# Altium PCB TAUV-Powerboard.PcbDoc (part 2 of 2)
Units mil, origin at the board's own origin, x right, y up, seen from the top; angles counter-clockwise.
Board outline 4762.5 x 3417.5 mil, 4 copper layers (Component Side, Ground Plane, Power Plane, Solder Side), stack 33.234 mil thick; 159 components, 82 nets, 454 pads, 262 vias.
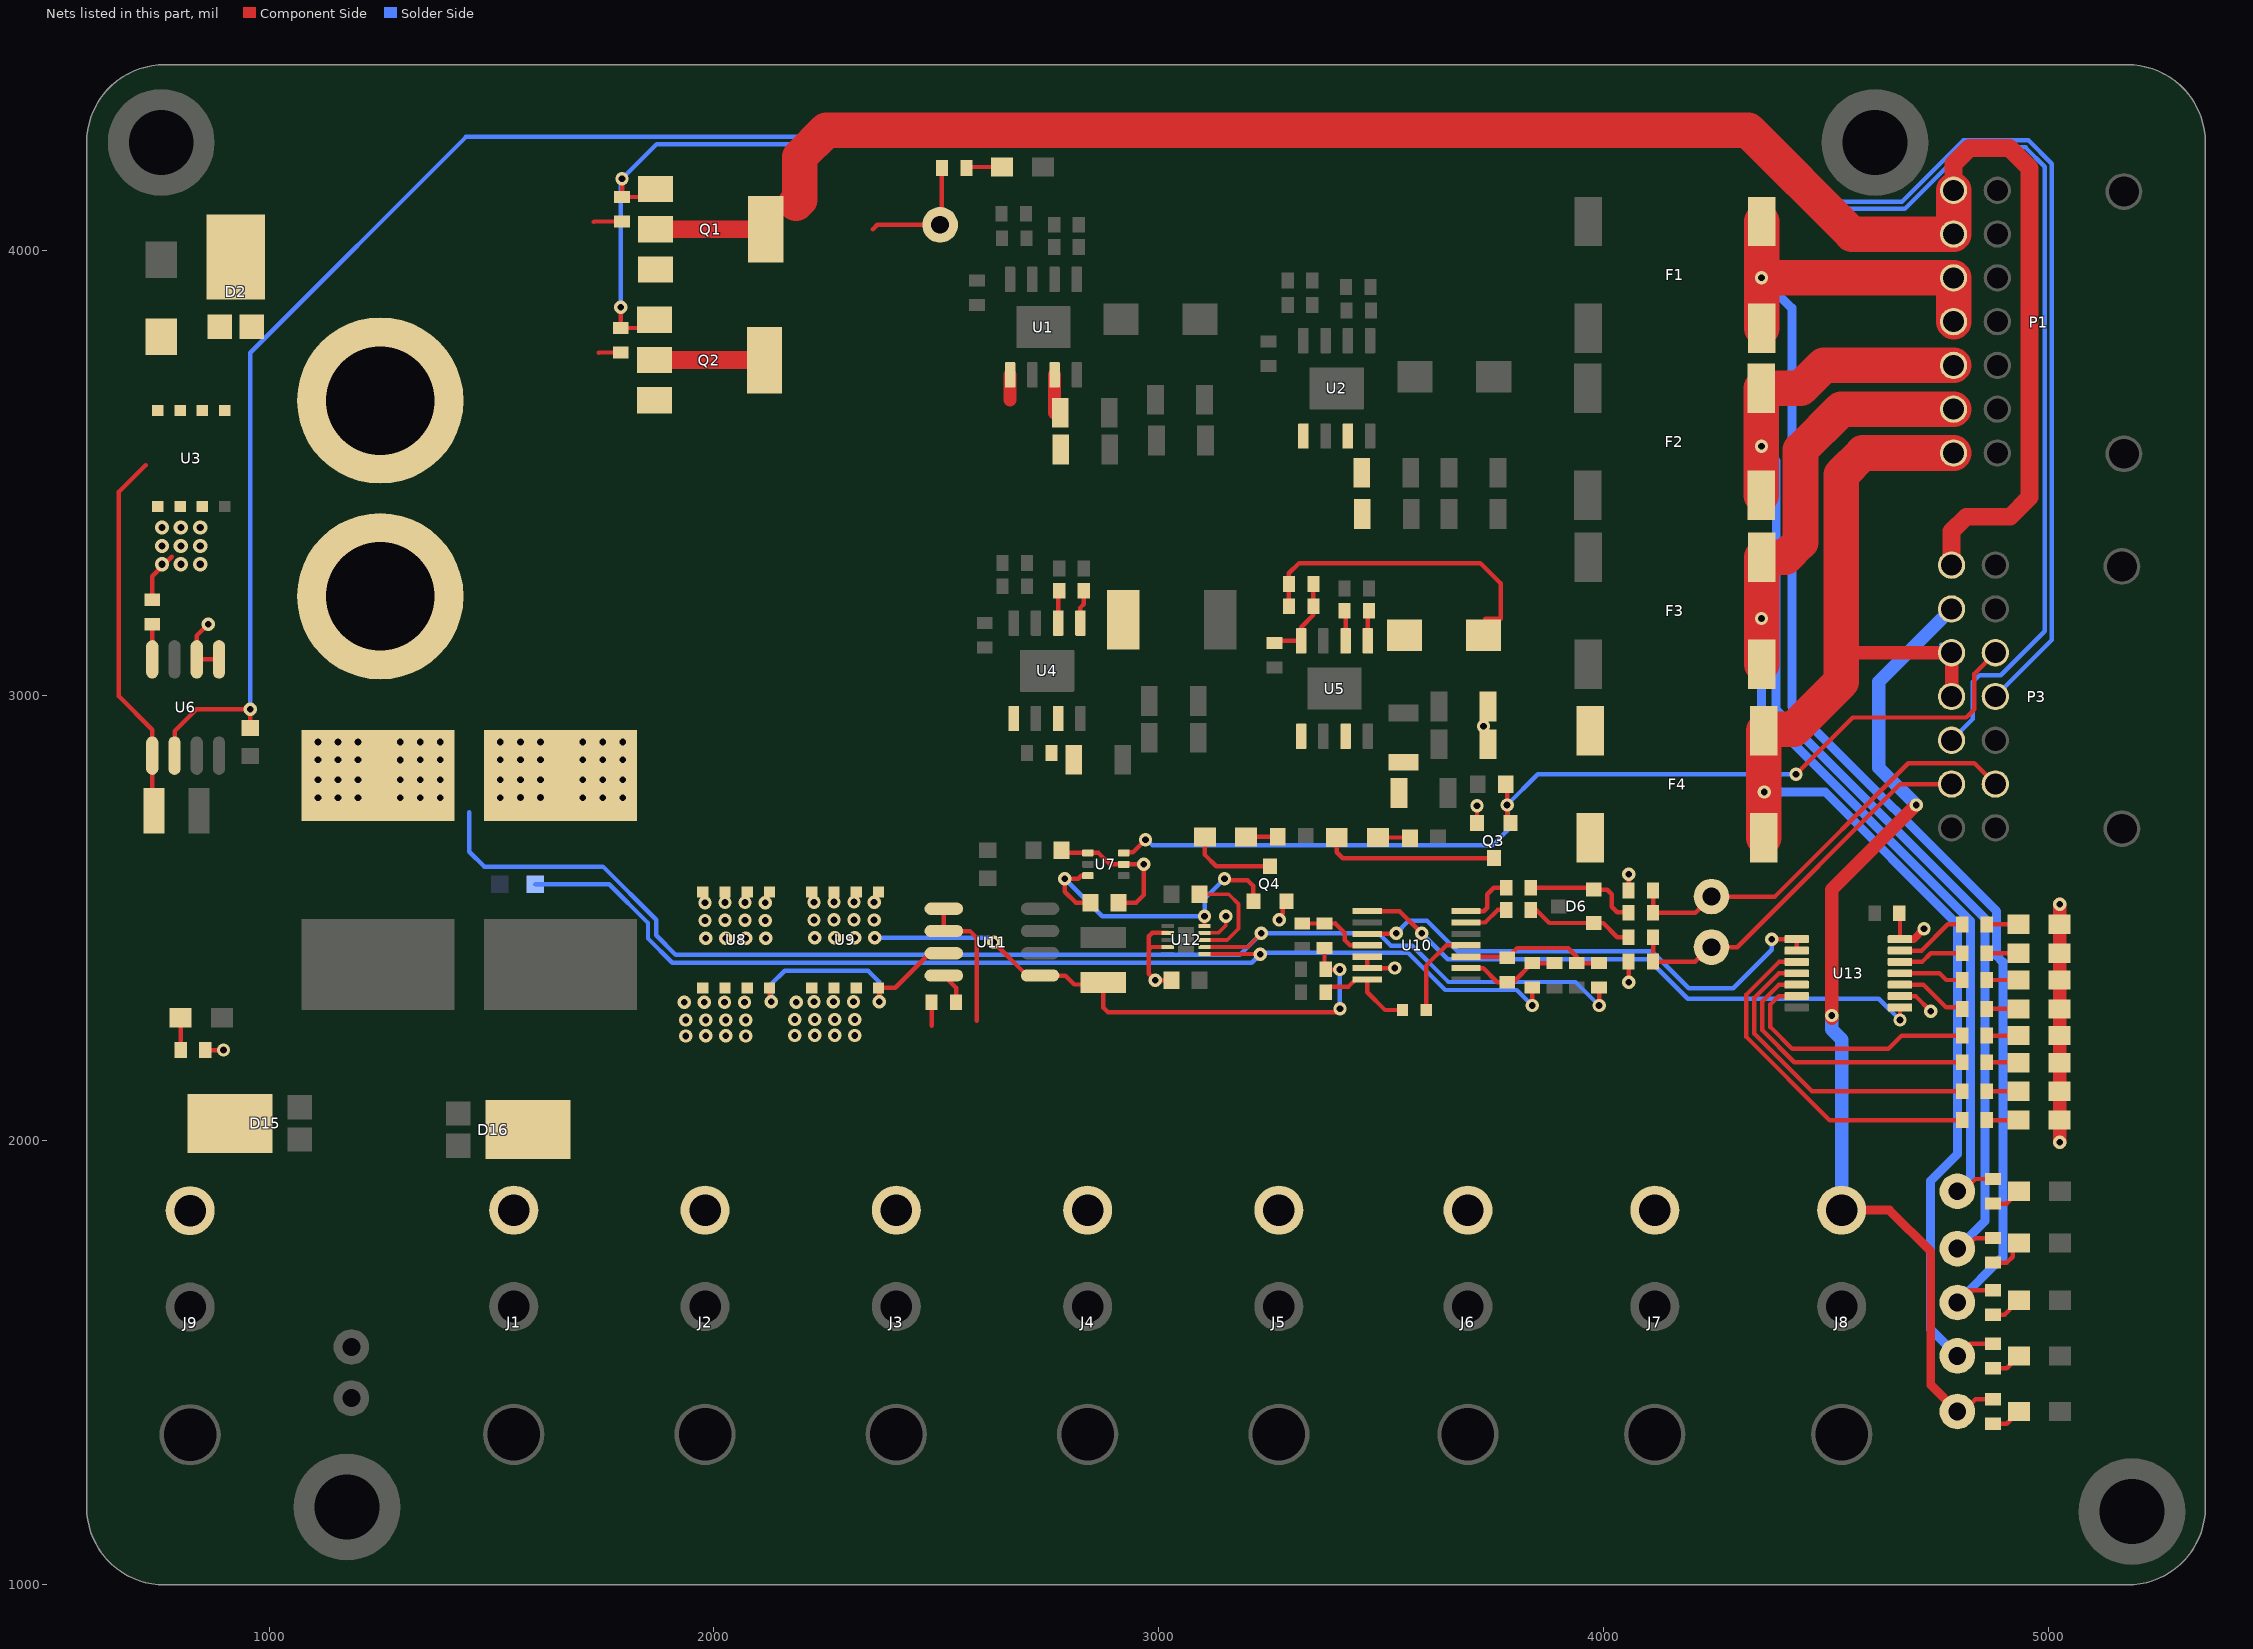
[diagram p4: the nets of this part, all layers, seen from the top]

## Via types
v1: diameter 30, hole 15, Component Side to Solder Side, tented both sides, 223 vias
v2: diameter 20, hole 10, Component Side to Solder Side, tented top, 18 vias
v3: diameter 32, hole 16, Component Side to Solder Side, tented both sides, 15 vias
v4: diameter 20, hole 10, Component Side to Solder Side, tented both sides, 6 vias

## Nets (pads, with @x,y where several pads share a name; then routed paths per layer and width w, separated by ;. In a path a pad name is that pad's centre, name@x,y a point inside that pad or via, vN(x,y) a via of type N, cw(c..) or ccw(c..) an arc to the next point about the centre after c; other vN are vias at no path point) (continued)
NetC18_1: C18.1 L3.1 U4.1 | length 75.8
  Component Side w10: U4.1@2823.94,3162.28 2823.94,3197.2 2831.5,3204.75 C18.1@2831.5,3235
NetC18_2: C18.2 U4.2 | length 73.7
  Component Side w10: U4.2@2773.94,3162.28 2773.94,3232.56 C18.2@2776.38,3235
NetC19_1: C19.1 U6.8 | length 79.1
  Component Side w10: U6.8@737.5,3080.77 C19.1@737.5,3159.88
NetC20_1: C20.1 R9.1 R11.2 U5.4 | length 202.7
  Component Side w10: R11.2@3260,3119.53 3260,3122.28 U5.4@3320,3122.28 3320,3153.2 3347.56,3180.76 C20.1@3347.56,3200 3347.56,3248.03 R9.1@3349.53,3250
NetC20_2: C20.2 C23.2 C26.2 F4.1 L4.2 R9.2 | length 693
  Component Side w10: C20.2@3292.44,3200 R9.2@3292.44,3250 3292.44,3273.98 3315.34,3296.88 3723.08,3296.88 3768.66,3251.31 3768.66,3172.03 3733.48,3172.03
  other v1: 3730,2930
NetC21_1: C21.1 L4.1 U5.1 | length 68.8
  Component Side w10: U5.1@3470,3122.28 3470,3187.44 C21.1@3472.56,3190
NetC21_2: C21.2 U5.2 | length 68.8
  Component Side w10: C21.2@3417.44,3190 3420,3187.44 U5.2@3420,3122.28
NetC40_1: C40.1 U11.8 | length 71.4
  Component Side w10: U11.8@2516.73,2370 2544.29,2342.44 C40.1@2544.29,2310
NetD1_2: D1.2 R1.1 | length 80.6
  Component Side w10: R1.1@2567.56,4185 2570.06,4187.5 D1.2@2647.12,4187.5
NetD2_2: D2.2 Q1.3 Q2.3 R3.2 R7.2 | length 113.5
  Component Side w10: 1730.04,4063.85 1731.13,4064.94 R3.2@1793.42,4064.94 ; 1741.04,3770.16 1741.36,3770.48 R7.2@1790.57,3770.48
NetD4_1: D4.1 R16.1 | length 67.8
  Component Side w10: D4.1@3196.28,2681.58 3255.84,2681.58 R16.1@3261.63,2687.38
NetD4_2: D4.2 Q4.3 | length 197.1
  Component Side w10: D4.2@3103.76,2681.58 3103.76,2641.02 3128.91,2615.87 Q4.3@3249.87,2615.87
NetD5_1: D5.1 R17.1 | length 73
  Component Side w10: D5.1@3492.63,2680.23 3563.33,2680.23 R17.1@3564.93,2678.63
NetD5_2: D5.2 Q3.3 | length 391.6
  Component Side w10: D5.2@3400.11,2680.23 3400.11,2647.16 3413.35,2633.92 Q3.3@3753.11,2633.92
NetD6_1: D6.1 R23.2 R28.1 | length 245.2
  Component Side w10: R23.2@3836.07,2517.5 3848.51,2517.5 3877.91,2488.1 D6.1@3977.88,2488.1 3999,2488.1 4030.82,2456.28 R28.1@4055.95,2456.28
NetD6_2: D6.2 R19.2 R24.1 | length 259.4
  Component Side w10: R19.2@3836.07,2567.5 3973.28,2567.5 D6.2@3977.88,2562.9 4008.11,2562.9 4018.51,2552.5 4018.51,2524.81 4030.82,2512.5 4054.73,2512.5 R24.1@4055.95,2511.28
NetD7_1: D7.1 R25.2 | length 71.2
  Component Side w10: R25.2@4861.3,2485 D7.1@4932.48,2485
NetD8_1: D8.1 R29.2 | length 71.2
  Component Side w10: R29.2@4861.3,2420 D8.1@4932.48,2420
NetD9_1: D9.1 R33.2 | length 71.2
  Component Side w10: R33.2@4861.3,2360 D9.1@4932.48,2360
NetD10_1: D10.1 R34.2 | length 71.2
  Component Side w10: R34.2@4861.3,2295 D10.1@4932.48,2295
NetD11_2: D11.2 R36.1 | length 72.5
  Component Side w10: R36.1@801.19,2202.5 801.24,2202.55 D11.2@801.24,2275
NetD12_1: D12.1 R35.2 | length 71.2
  Component Side w10: R35.2@4861.3,2235 D12.1@4932.48,2235
NetD13_1: D13.1 R37.2 | length 71.6
  Component Side w10: R37.2@4861.3,2175 4931.5,2175 D13.1@4932.48,2174.02
NetD14_1: D14.1 R38.2 | length 71.2
  Component Side w10: R38.2@4861.3,2110 D14.1@4932.48,2110
NetD17_1: D17.1 R39.2 | length 71.2
  Component Side w10: R39.2@4861.3,2045 D17.1@4932.48,2045
NetD18_2: D18.2 R40.1 | length 71.9
  Component Side w10: R40.1@4875,1857.44 4906.18,1857.44 4914.13,1865.39 4914.13,1868.35 4930.79,1885 D18.2@4933.74,1885
NetD19_2: D19.2 R41.1 | length 86.8
  Component Side w10: R41.1@4875,1724.72 4906.18,1724.72 4919.61,1738.15 4919.61,1754.82 D19.2@4933.74,1768.95
NetD20_2: D20.2 R42.1 | length 72.2
  Component Side w10: R42.1@4875,1607.44 4901.18,1607.44 D20.2@4933.74,1640
NetD21_2: D21.2 R43.1 | length 70.2
  Component Side w10: R43.1@4875,1487.44 4906.18,1487.44 D21.2@4933.74,1515
NetD22_2: D22.2 R44.1 | length 70.2
  Component Side w10: R44.1@4875,1362.44 4906.18,1362.44 D22.2@4933.74,1390
NetP3_5: P3.5 Q1.1 Q2.1 R3.1 R7.1 | length 5312.9
  Component Side w10: v1(1790.57,3872.47) R7.1@1790.57,3825.6 1847.54,3825.6 Q2.1@1865.98,3844.05 ; v1(1793.42,4160.9) R3.1@1793.42,4120.06 1850.33,4120.06 Q1.1@1868.48,4138.21
  Solder Side w10: v1(1790.57,3872.47) 1790.57,4158.05 v1(1793.42,4160.9) 1871.52,4239 4341,4239 4486.58,4093.42 4677.27,4093.42 4815.35,4231.5 4948.37,4231.5 4991.5,4188.37 4991.5,3144 4892.5,3045 4845,3045 4830,3030 4830,2946.69 P3.5@4782.13,2898.82
NetP3_6: P3.6 R28.2 R30.1 TP3.1 | length 891.4
  Component Side w10: R28.2@4111.07,2456.28 R30.1@4111.07,2401.28 4205.5,2401.28 4238,2433.78 TP3.1@4242.5,2433.78 4300.19,2433.78 4666.8,2800.39 P3.6@4782.13,2800.39
NetP3_11: P3.11 R12.1 U6.2 | length 6721.6
  Component Side w10: U6.2@787.5,2864.23 787.5,2918.89 836.91,2968.31 v1(957.5,2968.31) R12.1@957.5,2934
  Solder Side w10: v1(957.5,2968.31) 957.5,3770 1442.5,4255 4347.63,4255 4493.21,4109.42 4670.65,4109.42 4808.72,4247.5 4955,4247.5 5007.5,4195 5007.5,3124.19 P3.11@4880.55,2997.24
NetP3_13: P3.13 R20.1 R24.2 TP2.1 | length 978.3
  Component Side w10: R20.1@4111.07,2561.28 R24.2@4111.07,2511.28 4206.28,2511.28 TP2.1@4242.5,2547.5 4385,2547.5 4685,2847.5 4833.44,2847.5 P3.13@4880.55,2800.39
NetR19_1: R19.1 U10.14 | length 130.1
  Component Side w10: U10.14@3690.51,2514.77 3730.78,2514.77 3738.51,2522.5 3738.51,2552.9 3753.11,2567.5 R19.1@3780.95,2567.5
NetR21_1: R21.1 U12.3 | length 238.9
  Component Side w8: R21.1@3091.5,2552.5 3157.28,2552.5 3179.17,2530.61 3179.17,2475.4 3153.67,2449.91 U12.3@3102.81,2449.91
NetR23_1: R23.1 U10.13 | length 102.2
  Component Side w10: U10.13@3690.51,2489.18 3733.5,2489.18 3761.82,2517.5 R23.1@3780.95,2517.5
NetR25_1: R25.1 U13.13 | length 164.4
  Component Side w10: U13.13@4666.14,2426.18 4715,2426.18 4773.82,2485 R25.1@4806.18,2485
NetR26_2: R26.2 R27.1 U10.4 | length 175.6
  Component Side w10: R26.2@3322.5,2486.94 3396.45,2486.94 3396.54,2487.03 3418.51,2465.06 3418.51,2449.27 3429.78,2438 U10.4@3468.51,2438
NetR29_1: R29.1 U13.12 | length 148.1
  Component Side w10: U13.12@4666.14,2400.59 4715.83,2400.59 4735.24,2420 R29.1@4806.18,2420
NetR33_1: R33.1 U13.11 | length 146.3
  Component Side w10: U13.11@4666.14,2375 4755,2375 4770,2360 R33.1@4806.18,2360
NetR34_1: R34.1 U13.10 | length 162.6
  Component Side w10: U13.10@4666.14,2349.41 4718.82,2349.41 4770,2298.23 4802.95,2298.23 R34.1@4806.18,2295
NetR35_1: R35.1 U13.6 | length 581.4
  Component Side w10: U13.6@4433.86,2323.82 4393.82,2323.82 4375,2305 4375,2254.23 4424.23,2205 4640,2205 4670,2235 R35.1@4806.18,2235
NetR37_1: R37.1 U13.5 | length 636.8
  Component Side w10: U13.5@4433.86,2349.41 4393.95,2349.41 4357,2312.46 4357,2246.78 4428.78,2175 R37.1@4806.18,2175
NetR38_1: R38.1 U13.4 | length 719
  Component Side w10: U13.4@4433.86,2375 4394.09,2375 4339,2319.91 4339,2239.32 4468.32,2110 R38.1@4806.18,2110
NetR39_1: R39.1 U13.3 | length 801.3
  Component Side w10: U13.3@4433.86,2400.59 4394.22,2400.59 4321,2327.37 4321,2231.87 4507.87,2045 R39.1@4806.18,2045
NetRT1_2: RT1.2 U10.11 | length 208.4
  Component Side w10: RT1.2@3600.88,2292.5 3600.88,2392.31 3646.57,2438 U10.11@3690.51,2438
OCP_N: Q4.1 R22.1 U7.3 U12.5 | length 730.9
  Component Side w8: U12.5@3102.81,2481.41 v1(3102.81,2503.28)
  Component Side w10: U7.3@2840.66,2594.48 2825.67,2594.48 2818.69,2587.5 v1(2788.83,2587.5) 2788.83,2558.24 2813.12,2533.95 R22.1@2846.44,2533.95 ; v1(3147.75,2587.5) 3151.57,2583.67 3200.17,2583.67 3212.47,2571.38 Q4.1@3212.47,2537.13
  Solder Side w10: v1(2788.83,2587.5) 2873.05,2503.28 v1(3102.81,2503.28) 3102.81,2542.57 v1(3147.75,2587.5)
P1: U10.3 U13.1 U13.2 | length 1125.8
  Component Side w10: U10.3@3468.51,2463.59 3532.04,2463.59 v1(3533.51,2465.06) ; v1(4378.02,2451.77) U13.1@4433.86,2451.77 U13.2@4433.86,2426.18
  Solder Side w10: v1(3533.51,2465.06) 3561.51,2493.06 3602.95,2493.06 3671.68,2424.33 4107.81,2424.33 4191.01,2341.13 4291.13,2341.13 4378.02,2428.02 v1(4378.02,2451.77)
P2: U10.1 U13.8 | length 1327.5
  Component Side w10: U10.1@3468.51,2514.77 3541.24,2514.77 v1(3590.95,2465.06) ; v1(4666.14,2270.12) U13.8@4666.14,2298.23
  Solder Side w10: v1(3590.95,2465.06) 3649.68,2406.33 4100.31,2406.33 4189.14,2317.5 4500.4,2317.5 4500.9,2318 4618.26,2318 v1(4666.14,2270.12)
REG25: C39.2 RT1.1 U10.7 | length 231.1
  Component Side w10: C39.2@3375.06,2332.41 3375.06,2336.35 3383.84,2345.13 3425.49,2345.13 ; 3426.5,2345.22 3442.51,2361.23 U10.7@3468.51,2361.23 3468.51,2332.62 3508.63,2292.5 RT1.1@3547.74,2292.5
RSENSE+: NT1.2 R31.1 U12.1 | length 2558.9
  Component Side w8: U12.1@3102.81,2418.41 3227.26,2418.41 v1(3227.91,2417.76)
  Component Side w10: v1(3839.73,2302.5) R31.1@3839.73,2342.97
  Solder Side w10: NT1.2@1598.56,2575 1765,2575 1851.82,2488.18 1851.82,2453.18 1906.23,2398.77 3208.92,2398.77 v1(3227.91,2417.76) 3231.21,2421.06 3560.09,2421.06 3643.65,2337.5 3804.73,2337.5 v1(3839.73,2302.5)
RSENSE-: P2.1 R13.1 R14.1 R32.1 U12.2 | length 3012.9
  Component Side w8: U12.2@3102.81,2434.16 3199.84,2434.16 v1(3230.68,2465)
  Component Side w10: v1(3989.73,2302.5) R32.1@3989.73,2342.97
  Solder Side w10: 1450,2736.77 1450,2648.56 1483.56,2615 1750.46,2615 1870.16,2495.3 1870.16,2460.3 1913.69,2416.77 3182.44,2416.77 v1(3230.68,2465) 3493.97,2465 3521.91,2437.06 3569.54,2437.06 3651.1,2355.5 3936.73,2355.5 v1(3989.73,2302.5)
  other v1: 1110,2769.76 1155,2769.88 1200,2769.88 1295,2769.65 1340,2769.76 1385,2769.76 1520,2769.88 1565,2770 1610,2770 1705,2769.76 1750,2769.88 1795,2769.88 1110,2809.76 1155,2809.88 1200,2809.88 1295,2809.76 1340,2809.88 1385,2809.88 1520,2809.88 1565,2810 1610,2810 1705,2809.88 1750,2810 1795,2810 1110,2854.76 1155,2854.88 1200,2854.88 1295,2854.65 1340,2854.76 1385,2854.76 1520,2854.88 1565,2855 1610,2855 1705,2854.76 1750,2854.88 1795,2854.88 1110,2894.88 1155,2895 1200,2895 1295,2894.76 1340,2894.88 1385,2894.88 1520,2895 1565,2895.12 1610,2895.12 1705,2894.88 1750,2895 1795,2895
SRN: C34.1 C36.2 R32.2 U10.10 | length 331.6
  Component Side w10: U10.10@3690.51,2412.41 3781.16,2412.41 C34.1@3783.51,2410.06 3805.36,2431.91 3920.23,2431.91 3939.73,2412.41 C36.2@3939.73,2398.09 R32.2@3989.73,2398.09
SRP: C34.2 C35.2 R31.2 U10.9 | length 230.3
  Component Side w10: U10.9@3690.51,2386.82 3729.19,2386.82 3761.07,2354.94 C34.2@3783.51,2354.94 3796.58,2354.94 R31.2@3839.73,2398.09 C35.2@3889.73,2398.09
THRST_EN: P3.10 Q3.1 R15.1 U7.6 | length 2328.6
  Component Side w10: U7.6@2921.37,2645.66 2922.66,2646.96 2941.96,2646.96 v1(2970,2675) ; R15.1@3779.83,2800 3782.92,2796.91 v1(3782.92,2753.43) 3782.92,2720.25 Q3.1@3790.51,2712.66 ; v1(4432.5,2822.5) 4560,2950 4815,2950 4833.44,2968.44 4833.44,3048.56 P3.10@4880.55,3095.67
  Solder Side w10: v1(2970,2675) 2973.36,2675 2985.86,2662.5 3750,2662.5 3782.92,2695.42 v1(3782.92,2753.43) 3852,2822.5 v1(4432.5,2822.5)
THRUSTERS_GATE: U8.4 U9.4 U11.7 | length 595.4
  Component Side w10: U8.4@2125,2342.32 2125,2311.37 v1(2129.1,2311.37) ; v1(2371.27,2310.7) 2371.27,2341.05 U9.4@2370,2342.32 2407.32,2342.32 2485,2420 U11.7@2516.73,2420
  Solder Side w10: v1(2129.1,2311.37) 2129.1,2350.82 2158.87,2380.59 2346.48,2380.59 2371.27,2355.79 v1(2371.27,2310.7)
VBAT: C30.2 C33.2 C37.2 D2.1 D3.1 P2.2 R27.2 U3.5 U3.6 U3.7 U3.8 U6.1 U8.5 U8.6 U8.7 U8.8 U9.5 U9.6 U9.7 U9.8 U11.1 | length 2166.1
  Component Side w10: 722.5,3517.5 662.5,3457.5 662.5,2997.5 737.5,2922.5 U6.1@737.5,2864.23 737.5,2744.14 C30.2@741.64,2740 ; v1(2629.14,2444.77) 2703.9,2370 U11.1@2733.27,2370 2789.71,2370 2809.83,2349.88 2870.08,2349.88 C33.2@2875,2354.8 2875,2298 2885.86,2287.14 3399.64,2287.14 v1(3407.5,2295) ; R27.2@3376.91,2427.41 R27.2@3372.5,2431.82 3372.5,2386.94 C37.2@3375.06,2384.38 3375.96,2383.48 v1@3405.92,2383.48
  Solder Side w10: v1(2361.43,2455) 2618.9,2455 v1(2629.14,2444.77) ; v1(3406.93,2383.57) 3406.93,2295.57 v1(3407.5,2295)
  other v1: 1981.43,2453.95 2026.43,2454.06 2071.43,2454.06 2116.43,2453.95 2226.43,2455 2271.43,2455.12 2316.43,2455.12 1980,2493.83 2025,2493.95 2070,2493.95 2115,2493.83 2225,2494.88 2270,2495 2315,2495 2360,2494.88 1980,2533.95 2025,2534.06 2070,2534.06 2115,2533.95 2225,2535 2270,2535.12 2315,2535.12 2360,2535
VBAT_EXT: C19.2 D15.2 J9.2 R36.2 U3.1 U3.2 U3.3 U6.5 U6.6 | length 295.6
  Component Side w10: C19.2@737.5,3215 737.5,3267.83 781.1,3311.43 ; R36.2@856.31,2202.5 v1(897.67,2202.5) ; v1(863.18,3159.88) 837.5,3134.2 U6.6@837.5,3080.77 U6.5@887.5,3080.77
  other v3: 759.33,3294.58 801.72,3294.58 845.31,3294.58 759.33,3335.53 801.72,3335.53 845.31,3335.53 759.33,3376.9 801.72,3376.9 845.31,3376.9
VBAT_THRUSTERS: C40.2 D16.2 J1.2 J2.2 J3.2 J4.2 J5.2 J6.2 J7.2 J8.2 P3.2 R44.2 TP10.1 U8.1 U8.2 U8.3 U9.1 U9.2 U9.3 U11.5 U11.6 | length 2639.1
  Component Side w10: C40.2@2489.17,2310 2489.17,2257.82 2490,2256.99 ; U11.5@2516.73,2520 U11.6@2516.73,2470 2575.44,2470 2590.44,2455 2590.44,2268.47 ; TP10.1@4795,1390 4808.3,1390 4835.86,1417.56 R44.2@4875,1417.56
  Component Side w20: J8.2@4535,1842.52 4642.48,1842.52 4735.24,1749.76 4735.24,1449.76 TP10.1@4795,1390
  Component Side w30: v1(4512.5,2280) 4512.5,2273.64 4512.5,2563.43 v1(4702.5,2753.43)
  Solder Side w30: v1(4512.5,2280) 4512.5,2248.64 4535,2226.14 J8.2@4535,1842.52 ; v1(4702.5,2753.43) 4618.76,2837.17 4618.76,3030.73 P3.2@4782.13,3194.09
  other v1: 1936.43,2234.21 1981.43,2234.33 2026.43,2234.33 2071.43,2234.21 2181.43,2235.26 2226.43,2235.38 2271.43,2235.38 2316.43,2235.26 1936.43,2270 1981.43,2270.12 2026.43,2270.12 2071.43,2270 2181.43,2271.05 2226.43,2271.17 2271.43,2271.17 2316.43,2271.05 1933.6,2310 1978.6,2310.12 2023.6,2310.12 2068.6,2310 2185,2310 2225,2310.7 2268.6,2311.17 2313.6,2311.05
VCC_3V3: C31.2 C32.2 C38.2 D7.2 D8.2 D9.2 D10.2 D12.2 D13.2 D14.2 D17.2 F4.2 P1.7 P3.3 P3.4 Q3.2 Q4.2 R20.2 R22.2 R30.2 R43.2 TP8.1 U7.1 U7.5 U10.5 U10.6 U12.4 U12.7 U12.9 U13.9 U13.14 | length 4864.6
  Component Side w8: U12.4@3102.81,2465.66 3103.04,2465.88 3134.4,2465.88 3150.89,2482.37 v1(3150.89,2503.28)
  Component Side w10: C31.2@2788.83,2652.5 2795.67,2645.66 U7.1@2840.66,2645.66 2864.52,2645.66 2890.11,2620.07 U7.5@2921.37,2620.07 v1(2966.31,2620.07) 2966.31,2550.98 2949.28,2533.95 R22.2@2909.43,2533.95 ; U12.9@3020.14,2434.16 2983.66,2434.16 2977.56,2428.06 ; U12.7@3020.14,2465.66 2985.14,2465.66 2977.56,2458.08 2977.56,2428.06 ; C38.2@3028.5,2359.24 v1(2992,2359.24) 2977.56,2373.68 2977.56,2428.06 ; v1(3270.5,2495) 3270.5,2500.41 3278.87,2508.78 3278.87,2528.73 Q4.2@3287.27,2537.13 ; U10.5@3468.51,2412.41 U10.6@3468.51,2386.82 3530.04,2386.82 v1(3530.16,2386.94) ; v1(3715.34,2751.54) 3715.34,2713.04 Q3.2@3715.71,2712.66 ; R30.2@4055.95,2401.28 4055.95,2355.14 v1(4056.16,2354.94) ; R20.2@4055.95,2561.28 4055.95,2597.3 v1(4056.16,2597.5) ; U13.9@4666.14,2323.82 4701.18,2323.82 v1(4735,2290) ; U13.14@4666.14,2451.77 C32.2@4666.14,2508.44 ; TP8.1@4795,1515 4822.56,1542.56 R43.2@4875,1542.56
  Component Side w17: C32.2@4664.58,2510 C32.2@4666.14,2508.44 ; U13.14@4666.14,2451.77 4696.77,2451.77 v1(4720,2475)
  Component Side w30: 4534.19,3094.83 4535.04,3095.67 P3.3@4782.13,3095.67 P3.4@4782.13,2997.24 ; v1(5025,1995) D17.2@5025,2045 D14.2@5025,2110 D13.2@5025,2174.02 D12.2@5025,2235 D10.2@5025,2295 D9.2@5025,2360 D8.2@5025,2420 D7.2@5025,2485 v1(5025,2530)
  Component Side w80: F4.2@4360,2680 4360,2782.5 F4.2@4360,2920 4363.71,2923.71 4427.57,2923.71 4534.19,3030.33 4534.19,3094.83 4534.19,3495.96 4582.87,3544.64 P1.7@4786.57,3544.64
  Solder Side w10: P3.3@4758.9,3113.6 P3.3@4773.5,3099
  Solder Side w20: v1(4360.91,2782.5) 4498.23,2782.5 4795,2485.73 4795,1968.54 4735,1908.54 4735,1575 TP8.1@4795,1515
VCC_5V: F1.2 P1.3 P1.4 R42.2 TP6.1 | length 3431.9
  Component Side w10: TP6.1@4795,1635 4822.56,1662.56 R42.2@4875,1662.56
  Component Side w80: F1.2@4355,3825 v1(4355,3938.34) ; F1.2@4355,4065 v1(4355,3938.34) ; P1.4@4786.57,3839.92 P1.3@4786.57,3938.34 v1(4355,3938.34)
  Solder Side w20: v1(4355,3938.34) 4423.22,3870.13 4423.22,2974.28 4883.5,2514 4883.5,2414 4897.5,2400 4897.5,1737.5 TP6.1@4795,1635
VCC_5V_SRV: F2.2 P1.5 R41.2 TP5.1 | length 2821.8
  Component Side w10: TP5.1@4795,1756.11 4812.13,1756.11 4835.86,1779.84 R41.2@4875,1779.84
  Component Side w80: F2.2@4354.25,3450 4354.25,3560 F2.2@4354.25,3690 4443.35,3690 4494.85,3741.49 P1.5@4786.57,3741.49
  Solder Side w20: v1(4355,3560) 4388,3527 4388,3158.83 4387.5,3158.33 4387.5,2967.5 4857.5,2497.5 4857.5,1818.61 TP5.1@4795,1756.11
VCC_10V: F3.2 P1.6 R40.2 TP4.1 | length 2516.8
  Component Side w10: TP4.1@4795,1885 4808.3,1885 4835.86,1912.56 R40.2@4875,1912.56
  Component Side w80: F3.2@4355,3070 v1(4355,3172.5) F3.2@4355,3310 4408.15,3310 4442.5,3344.35 4442.5,3551.38 4534.19,3643.07 P1.6@4786.57,3643.07
  Solder Side w20: v1(4355,3172.5) 4355,2962.5 4825,2492.5 4825,1915 TP4.1@4795,1885
VCC_BATT_FILT: C8.2 C10.2 C12.2 C14.2 C24.2 C27.2 C28.2 C29.2 P1.1 P1.2 P3.1 Q1.2 Q1.4 Q2.2 Q2.4 R1.2 TP1.1 U1.5 U1.7 U2.5 U2.7 U4.5 U4.7 U5.5 U5.7 | length 5141.6
  Component Side w10: 2357.43,4047.66 2367.28,4057.5 TP1.1@2508.5,4057.5 ; TP1.1@2512.44,4061.44 R1.2@2512.44,4185
  Component Side w30: TP1.1@2508.5,4057.5 TP1.1@2512.44,4061.44 ; 2665.63,3664.41 U1.5@2665.63,3720.22 ; U1.7@2765.63,3720.22 2765.63,3635 C8.2@2778.32,3635
  Component Side w40: Q2.2@1865.98,3753.49 Q2.4@2114.02,3753.49 ; Q1.2@1868.48,4047.66 Q1.4@2116.52,4047.66 ; P3.1@4782.13,3292.52 4782.13,3368.58 4815,3401.45 4913.95,3401.45 4957.5,3445 4957.5,4185 4912.5,4230 4822.5,4230 4786.57,4194.07 P1.1@4786.57,4135.19
  Component Side w80: 2184.42,4106.22 2192.5,4114.31 2192.5,4210 2252.5,4270 4325,4270 4558.23,4036.77 P1.2@4786.57,4036.77 P1.1@4786.57,4135.19
pads on no net: J1. J2. J3. J4. J5. J6. J7. J8. J9. P1. P3. U6.3 U10.2 U10.12 U11.3

## Polygon pours and split planes (outlines as drawn)
no net on Bottom Solder "Solder Side-GND" (solid, pour order 8): 1833.12,2461.87 1833.13,2282.03 cw(c1621.38,2282.03) 1621.38,2070.29 ccw(c1621.38,1908.91) 1460,1908.9 1460,1806 ccw(c1550.72,1806) 1550.72,1715.29 4649.71,1715.29 cw(c4649.72,1665) 4700,1665 4700,1030.29 1154.71,1030.29 cw(c1154.71,1155) 1030,1155 1030,2475 cw(c1070,2475) 1070,2515 1780,2515 cw(c1780,2461.88)
GND on Solder Side "Solder Side-GND" (solid, pour order 4): 1833.12,2461.87 1833.13,2282.03 cw(c1621.39,2282.03) 1621.38,2070.29 ccw(c1621.38,1908.91) 1460,1908.9 1460,1806 ccw(c1550.72,1806) 1550.72,1715.29 4649.71,1715.29 cw(c4649.72,1665) 4700,1665 4700,1030.29 1154.71,1030.29 cw(c1154.71,1155) 1030,1155 1030,2475 cw(c1070,2475) 1070,2515 1780,2515 cw(c1780,2461.88)
GND on Component Side "Component Side-GND" (solid, pour order 2): 1870,2475 1870,2332.5 cw(c1655,2332.5) 1655,2117.5 1512.5,2117.5 ccw(c1512.5,2065) 1460,2065 1460,1807.91 ccw(c1552.91,1807.91) 1552.91,1715 4650,1715 cw(c4650,1665) 4700,1665 4700,1030 1155,1030 cw(c1155,1155) 1030,1155 1030,2475 cw(c1070,2475) 1070,2515 1830,2515 cw(c1830,2475)
VCC_3V3 on Power Plane (split plane): 5188.56,4397.1 5199.56,4395.92 5210.45,4393.96 5221.17,4391.22 5231.67,4387.73 5241.89,4383.49 5251.78,4378.54 5261.3,4372.89 5270.39,4366.58 5279,4359.64 5287.1,4352.1 5294.64,4344 5301.58,4335.39 5307.89,4326.3 5313.54,4316.78 5318.49,4306.89 5322.73,4296.67 5326.22,4286.17 5328.96,4275.45 5330.92,4264.56 5332.1,4253.56 5332.47,4243.21 5332.4,4242.5 5332.4,1175 5332.47,1174.29 5332.1,1163.94 5330.92,1152.94 5328.96,1142.05 5326.22,1131.33 5322.73,1120.83 5318.49,1110.61 5313.54,1100.72 5307.89,1091.2 5301.58,1082.11 5294.64,1073.5 5287.1,1065.4 5279,1057.86 5270.39,1050.92 5261.3,1044.61 5251.78,1038.96 5241.89,1034.01 5231.67,1029.77 5221.17,1026.28 5210.45,1023.54 5199.56,1021.58 5188.56,1020.4 5178.21,1020.03 5177.5,1020.1 765,1020.1 764.29,1020.03 753.94,1020.4 742.94,1021.58 732.05,1023.54 721.33,1026.28 710.83,1029.77 700.61,1034.01 690.72,1038.96 681.2,1044.61 672.11,1050.92 663.5,1057.86 655.4,1065.4 647.86,1073.5 640.92,1082.11 634.61,1091.2 628.96,1100.72 624.01,1110.61 619.77,1120.83 616.28,1131.33 613.54,1142.05 611.58,1152.94 610.4,1163.94 610.03,1174.29 610.1,1175 610.1,4242.5 610.03,4243.21 610.4,4253.56 611.58,4264.56 613.54,4275.45 616.28,4286.17 619.77,4296.67 624.01,4306.89 628.96,4316.78 634.61,4326.3 640.92,4335.39 647.86,4344 655.4,4352.1 663.5,4359.64 672.11,4366.58 681.2,4372.89 690.72,4378.54 700.61,4383.49 710.83,4387.73 721.33,4391.22 732.05,4393.96 742.94,4395.92 753.94,4397.1 764.29,4397.47 765,4397.4 5177.5,4397.4 5178.21,4397.47
GND on Ground Plane (split plane): 5188.56,4397.1 5199.56,4395.92 5210.45,4393.96 5221.17,4391.22 5231.67,4387.73 5241.89,4383.49 5251.78,4378.54 5261.3,4372.89 5270.39,4366.58 5279,4359.64 5287.1,4352.1 5294.64,4344 5301.58,4335.39 5307.89,4326.3 5313.54,4316.78 5318.49,4306.89 5322.73,4296.67 5326.22,4286.17 5328.96,4275.45 5330.92,4264.56 5332.1,4253.56 5332.47,4243.21 5332.4,4242.5 5332.4,1175 5332.47,1174.29 5332.1,1163.94 5330.92,1152.94 5328.96,1142.05 5326.22,1131.33 5322.73,1120.83 5318.49,1110.61 5313.54,1100.72 5307.89,1091.2 5301.58,1082.11 5294.64,1073.5 5287.1,1065.4 5279,1057.86 5270.39,1050.92 5261.3,1044.61 5251.78,1038.96 5241.89,1034.01 5231.67,1029.77 5221.17,1026.28 5210.45,1023.54 5199.56,1021.58 5188.56,1020.4 5178.21,1020.03 5177.5,1020.1 765,1020.1 764.29,1020.03 753.94,1020.4 742.94,1021.58 732.05,1023.54 721.33,1026.28 710.83,1029.77 700.61,1034.01 690.72,1038.96 681.2,1044.61 672.11,1050.92 663.5,1057.86 655.4,1065.4 647.86,1073.5 640.92,1082.11 634.61,1091.2 628.96,1100.72 624.01,1110.61 619.77,1120.83 616.28,1131.33 613.54,1142.05 611.58,1152.94 610.4,1163.94 610.03,1174.29 610.1,1175 610.1,4242.5 610.03,4243.21 610.4,4253.56 611.58,4264.56 613.54,4275.45 616.28,4286.17 619.77,4296.67 624.01,4306.89 628.96,4316.78 634.61,4326.3 640.92,4335.39 647.86,4344 655.4,4352.1 663.5,4359.64 672.11,4366.58 681.2,4372.89 690.72,4378.54 700.61,4383.49 710.83,4387.73 721.33,4391.22 732.05,4393.96 742.94,4395.92 753.94,4397.1 764.29,4397.47 765,4397.4 5177.5,4397.4 5178.21,4397.47

## Other copper
Component Side:
  region net VCC_BATT_FILT: 2205.48,4177.5 2070,4177.5 2070,4092.5 2070,3865.72 2070,3804.31 2070,3654.37 ccw(c2224.37,3654.37) 2224.37,3500 2292.2,3500 cw(c2292.22,3352.53) 2439.69,3352.51 2439.69,2991.36 ccw(c2713.54,2991.35) 2713.55,2717.5 3521.75,2717.5 ccw(c3521.75,2790.43) 3594.69,2790.43 3594.69,2860 ccw(c3584.72,2860.03) 3584.69,2870 3455.68,2870 cw(c3455.67,2887.67) 3438,2887.69 3438,2945 3399.69,2945 3399.69,2885 cw(c3381.59,2884.95) 3381.54,2866.85 3353.59,2866.85 cw(c3353.57,2885.73) 3334.69,2885.75 3334.69,2945 3299.69,2945 3299.69,2865 cw(c3244.5,2864.95) 3244.45,2809.76 2850.37,2809.76 cw(c2850.35,2825.42) 2834.69,2825.44 2834.69,2880 ccw(c2814.72,2880.03) 2814.69,2900 2799.69,2900 cw(c2799.67,2914.98) 2784.69,2915 2784.69,2965.15 ccw(c2771.39,2965.18) 2771.36,2978.48 ccw(c2771.31,2965.8) 2758.63,2965.74 2758.63,2901.5 cw(c2752.3,2901.45) 2752.25,2895.12 ccw(c2752.19,2882.61) 2739.69,2882.56 2739.69,2856.5 cw(c2723.24,2856.44) 2723.19,2840 2689.69,2840 cw(c2689.67,2854.98) 2674.69,2855 2674.69,2905 cw(c2679.69,2905) 2679.69,2910 ccw(c2679.69,2920) 2689.69,2920 2689.69,2964.06 ccw(c2678.78,2964.09) 2678.75,2975 2652.41,2975 cw(c2652.39,3055.14) 2572.25,3055.16 2572.25,3254.8 cw(c2682.44,3254.8) 2682.44,3365 3469.69,3365 ccw(c3469.69,3390) 3494.69,3390 3494.69,3500 3494.69,3527.5 ccw(c3482.2,3527.51) 3482.19,3540 3466.49,3540 cw(c3466.49,3556.24) 3450.25,3556.24 3450.25,3600.7 ccw(c3433.46,3600.71) 3433.45,3617.5 3410.38,3617.5 ccw(c3410.36,3606.83) 3399.69,3606.8 3399.69,3545.01 cw(c3384.7,3544.99) 3384.68,3530 3367.19,3530 cw(c3367.18,3547.97) 3349.22,3547.97 3349.22,3605 ccw(c3336.73,3605.01) 3336.72,3617.5 3312.19,3617.5 ccw(c3312.17,3605.02) 3299.69,3605 3299.69,3574.06 cw(c3225.65,3574.04) 3225.63,3500 2825.68,3500 cw(c2825.67,3510.98) 2814.69,3510.99 2814.69,3654.99 ccw(c2792.2,3655.01) 2792.18,3677.5 2648.18,3677.5 cw(c2648.18,3885.99) 2439.69,3885.99 2439.69,3943.3 ccw(c2205.49,3943.3)
  region net VBAT: 1356.83,3470 754.97,3470.03 cw(c754.98,3550) 675,3550 675,3790 cw(c757.5,3790) 757.5,3872.5 1527.4,3872.5 cw(c1527.41,3789.91) 1610,3789.91 1610,3755 ccw(c1879.68,3755) 1879.69,3485.31 2234.68,3485.31 cw(c2234.69,3305.01) 2415,3305 2415,2433.31 cw(c2361.7,2433.3) 2361.69,2380 2166.52,2380 1981.84,2380 cw(c1981.84,2451.84) 1910,2451.84 1910,2965 ccw(c1840.6,2965.01) 1840.59,3034.41 1552.34,3034.41 cw(c1552.34,3096.75) 1490,3096.75 1490,3336.83 ccw(c1356.83,3336.83)
  region net GND: 970.37,1697.5 795.55,1697.5 ccw(c795.55,1646.95) 745,1646.95 745,1598.05 ccw(c795.55,1598.05) 795.55,1547.5 970.87,1547.5 cw(c970.87,1488.37) 1030,1488.37 1030,1465 1097.5,1465 1097.5,1778.59 1030,1778.59 1030,1757.13 cw(c970.38,1757.12)
  region net NetD2_2: 1718.81,3624.19 1909.6,3624.19 1910.05,3695.86 1837.93,3696 cw(c1838.11,3784.11) 1750,3784.11 1750,3856.19 cw(c1816.36,3856.19) 1816.63,3922.54 1910.06,3922.16 1909.63,3990 1793.42,3990 cw(c1793.42,4019.04) 1764.38,4019.04 1764.38,4040.51 ccw(c1724.88,4040.51) 1724.88,4080 1606.82,4080 947.5,4080 947.5,3891.05 1542.65,3891.05 cw(c1542.66,3769.61) 1664.1,3770.63 1664.89,3677.65 ccw(c1718.81,3678.11)
  region net VBAT_EXT: 870,3437.5 733.43,3437.5 733.43,3294.07 ccw(c752.51,3294.07) 752.51,3275 839.46,3275 ccw(c839.46,3305.54) 870,3305.54
  region net VBAT_EXT: 870.38,1765.38 798.42,1765.38 cw(c798.42,1843.8) 720,1843.8 720,1992.5 cw(c836.38,1992.5) 836.38,2108.88 991.93,2108.88 cw(c991.93,2090.81) 1010,2090.81 1010,1905 cw(c870.38,1905)
  region net GND: 2911.04,2823.91 2957.36,2823.91 ccw(c2957.36,2866.54) 3000,2866.55 3000,3008.82 ccw(c2963.83,3008.82) 2963.82,3045 2828.98,3045 cw(c2828.98,3065.16) 2808.82,3065.16 2808.82,3070 2789.6,3070 2789.6,3008.82 cw(c2789.6,2989.6) 2808.82,2989.6 2808.82,2934.19 ccw(c2836.13,2934.19) 2836.13,2906.88 2859.56,2906.88 cw(c2859.56,2876.44) 2890,2876.44 2890,2844.96 ccw(c2911.04,2844.95)
  region net NetC16_2: 3106.71,2853.28 3136.84,2853.28 ccw(c3136.84,2896.44) 3180,2896.44 3180,3162.57 cw(c3210.31,3162.57) 3210.31,3192.88 ccw(c3210.31,3230.04) 3247.47,3230.04 3247.47,3302.53 ccw(c3209.68,3302.53) 3209.68,3340.32 3182.77,3340.32 ccw(c3182.77,3295.19) 3137.64,3295.27 3137.63,3289.13 cw(c3093.42,3289.21) 3093.42,3245 ccw(c3093.42,3211.58) 3060,3211.58 3060,2882.78 ccw(c3089.11,2882.77) 3088.49,2853.67
  region net NetC18_1: 2824.14,3135 2854.75,3135 cw(c2854.75,3105) 2884.75,3105 2920,3105 2920,3222.78 2884.75,3222.78 cw(c2851.97,3222.78) 2851.97,3190 2823.94,3190
  region net NetC16_2: 3995,3365 3871.9,3365 ccw(c3871.9,3318.1) 3825,3318.1 3825,3225.34 ccw(c3864.68,3225.34) 3864.68,3185.66 cw(c3871.29,3122.28) 3935,3122.28 3993.5,3122.28
  region net NetC6_1: 3472.5,3770 3517.16,3770 cw(c3517.16,3748.33) 3538.83,3748.33 3538.83,3682.28 3611.11,3682.28 3611.11,3772.14 ccw(c3559.69,3772.14) 3559.69,3823.56 3475,3823.56
  region net NetC3_1: 2875,3852.5 2875,3861.64 ccw(c2833.43,3861.64) 2833.43,3903.21 2800.28,3903.21 2800.28,3960.72 2873.54,3960.72 cw(c2873.54,3883.38) 2950.89,3883.38 2950.89,3810.88
  region net NetC2_2: 3917.5,3852.5 3990.7,3852.5 ccw(c3990.7,3869.3) 4007.5,3869.3 4007.5,4107.5 ccw(c3995,4107.5) 3995,4120 3269.87,4120 ccw(c3269.86,3879.66) 3029.52,3879.65 3029.52,3801.34 ccw(c3045,3801.34) 3045,3785.86 3052.18,3785.86 cw(c3052.19,3770.58) 3067.46,3770.58 3067.46,3552.99 ccw(c3088.17,3552.99) 3088.17,3532.28 3130.45,3532.28 ccw(c3130.45,3555.86) 3154.03,3555.86 3154.03,3886.49 cw(c3257.54,3886.49) 3257.54,3990 3799.67,3990 cw(c3799.67,3950.94) 3838.74,3950.93 3838.74,3931.26 ccw(c3917.5,3931.26)
  region net NetC5_2: 3705,3735.76 3705,3650.29 ccw(c3714.54,3650.29) 3714.54,3640.76 3720.25,3640.76 cw(c3720.25,3624.84) 3736.17,3624.84 3736.17,3369.58 3804.5,3369.58 3804.5,3380.15 cw(c3811.86,3380.15) 3811.86,3387.51 3973.5,3387.51 ccw(c3973.5,3414) 4000,3414 4000,3727.98 ccw(c3975.49,3727.99) 3975.48,3752.5 3721.74,3752.5 ccw(c3721.74,3735.76)
  region net GND: 2874.37,3515 2996.47,3515 ccw(c2996.47,3548.05) 3029.52,3548.05 3029.52,3683.53 ccw(c2990.6,3683.53) 2990.6,3722.45 2911.17,3722.45 cw(c2911.17,3766.19) 2867.42,3766.19 2867.42,3775.77 ccw(c2815.69,3775.77) 2815.69,3827.5 2764.16,3827.5 2764.16,3780.36 2772.17,3780.36 cw(c2772.17,3755.71) 2796.81,3755.71 2796.81,3700.69 ccw(c2809.05,3700.69) 2809.05,3688.44 2819.45,3688.44 cw(c2819.46,3652.72) 2855.18,3652.72 2855.18,3534.18 ccw(c2874.36,3534.18)
  region net GND: 3459.07,3614.94 3459.07,3559.57 ccw(c3466.14,3559.57) 3466.14,3552.5 3496.35,3552.5 cw(c3496.35,3525.07) 3523.78,3525.07 3523.78,3383.12 ccw(c3552.37,3383.12) 3552.37,3354.53 3668.5,3354.53 ccw(c3668.5,3386.66) 3700.63,3386.66 3700.63,3542.32 ccw(c3636.71,3542.32) 3636.71,3606.24 3535.04,3606.24 cw(c3535.04,3635.17) 3506.11,3635.17 3506.11,3645.58 ccw(c3461.69,3645.58) 3461.69,3690 3435.43,3690 3435.43,3642.5 3440.5,3642.5 cw(c3440.5,3623.93) 3459.07,3623.93
  region net NetC21_1: 3470,3150 3495,3150 ccw(c3495,3170) 3515,3170 3530,3170 3530,3098.99 3470,3098.99
  region net NetC20_2: 4000,2970 4000,2645 cw(c3980,2645) 3980,2625 3935,2625 cw(c3935,2685) 3875,2685 3875,2787.3 ccw(c3823.34,2787.3) 3823.34,2838.96 3742.51,2838.96 cw(c3742.51,2871.47) 3710,2871.47 3710,3070 ccw(c3695,3070) 3695,3085 cw(c3695,3107.67) 3672.33,3107.67 3672.33,3157.33 cw(c3695,3157.33) 3695,3180 3755,3180 cw(c3755,3110) 3825,3110 3825,3027.33 ccw(c3867.33,3027.33) 3867.33,2985 3985,2985 cw(c3985,2970)
  region net GND: 3676.22,2751.22 3676.22,2833.78 ccw(c3670.63,2833.78) 3670.63,2839.37 cw(c3670.63,2845.63) 3664.37,2845.63 3664.37,2980.63 ccw(c3625.63,2980.63) 3625.62,3019.38 3479.14,3019.38 cw(c3479.14,3043.52) 3455,3043.52 3455,3055 3425,3055 3425,2968.28 3426.72,2968.28 cw(c3426.72,2937.44) 3457.56,2937.44 3457.56,2880 3590,2880 cw(c3590,2850) 3620,2850 3620,2754.76 ccw(c3636.81,2754.76) 3636.81,2737.95 3662.95,2737.95 ccw(c3662.95,2751.22)
  region net VBAT_THRUSTERS: 1939.32,2363.73 2081.27,2363.73 cw(c2081.27,2355) 2090,2355 2090,2305 ccw(c2110,2305) 2110,2285 2145,2285 ccw(c2145,2305) 2165,2305 2165,2350 cw(c2174.99,2350) 2175,2360 2315,2360 cw(c2315,2336.11) 2338.9,2336.1 2338.9,2290.08 ccw(c2358.98,2290.08) 2358.98,2270 4160,2270 cw(c4160,2115) 4315,2115 ccw(c4500,2115) 4500,1930 4555,1930 cw(c4555,1885) 4600,1885 4600,1795 cw(c4545,1795) 4545,1740 1555,1740 cw(c1555,1810) 1485,1810 1485,2090 1665.59,2090 ccw(c1665.59,2334.41) 1910,2334.41 cw(c1939.32,2334.41)
  region net RSENSE-: 1240,3410 1365.53,3410 cw(c1365.53,3335.53) 1440,3335.53 1440,3038 ccw(c1508,3038) 1508,2970 1820.97,2970 cw(c1820.97,2925.97) 1865,2925.97 1865,2743.57 cw(c1828.63,2743.57) 1828.63,2707.2 1077.8,2707.2 cw(c1077.8,2740) 1045,2740 1045,3340 cw(c1115,3340) 1115,3410
Solder Side:
  region net VBAT: 1356.83,3470 1214.99,3470 cw(c1215,3640.01) 1045,3640 1045,3687.5 cw(c1230,3687.5) 1230,3872.5 1527.4,3872.5 cw(c1527.41,3789.91) 1610,3789.91 1610,3755 ccw(c1879.68,3755) 1879.69,3485.31 2234.68,3485.31 cw(c2234.69,3305.01) 2415,3305 2415,2485.12 cw(c2364.88,2485.12) 2364.88,2435 1976.87,2435 cw(c1976.87,2501.87) 1910,2501.87 1910,2965 ccw(c1840.6,2965.01) 1840.59,3034.41 1552.34,3034.41 cw(c1552.34,3096.75) 1490,3096.75 1490,3336.83 ccw(c1356.83,3336.83)
  region net VBAT_EXT: 920,3393.49 920,1817.5 cw(c850.95,1817.5) 850.95,1748.45 707.66,1748.45 cw(c707.66,1813.61) 642.5,1813.61 642.5,3391.98 cw(c692.65,3391.98) 692.65,3442.13 871.36,3442.13 cw(c871.36,3393.49)
  region net NetC16_2: 3170,3340 3895,3340 cw(c3895,3310) 3925,3310 3925,3225 cw(c3890,3225) 3890,3190 3165,3190 cw(c3165,3215) 3140,3215 3140,3310 cw(c3170,3310)
  region net RSENSE-: 1115,3410 1365,3410 cw(c1365,3335) 1440,3335 1440,3040 ccw(c1510,3040) 1510,2970 1820,2970 cw(c1820,2925) 1865,2925 1865,2744.03 cw(c1828.18,2744.03) 1828.17,2707.2 1077.8,2707.2 cw(c1077.8,2740) 1045,2740 1045,3340 cw(c1115,3340)
  region net VBAT_THRUSTERS: 1940.12,2363.73 2081.27,2363.73 cw(c2081.27,2355) 2090,2355 2090,2305 ccw(c2110,2305) 2110,2285 2145,2285 ccw(c2145,2305) 2165,2305 2165,2350 cw(c2175,2350) 2175,2360 2315,2360 cw(c2315,2336.1) 2338.9,2336.1 2338.9,2291.1 ccw(c2360,2291.1) 2360,2270 4160,2270 cw(c4160,2115) 4315,2115 ccw(c4500,2115) 4500,1930 4555,1930 cw(c4555,1885) 4600,1885 4600,1795 cw(c4545,1795) 4545,1740 1555,1740 cw(c1555,1810) 1485,1810 1485,1914.39 cw(c1615.61,1914.39) 1615.61,2045 1675,2045 ccw(c1675,2280) 1910,2280 1910,2333.61 cw(c1940.12,2333.61)

## Silkscreen, mask and mechanical layers (free items; w line width, h text height)
Top Overlay:
  region: 2380,2260 2271.43,2151.43 2271.43,2150 2380,2150
  region: 3870,2260 3973.7,2156.3 3873.7,2156.3 3870,2160
  region: 1910,2140 1900,2130 1900,1960 1915,1945 1915,2140
  region: 4190,2140 4207.52,2122.48 4207.52,1967.52 4185,1945 4185,2141.5
  region: 3748.33,2160 4170,2160 4190,2140 3775,2140
  region: 2380,2160 1930,2160 1910,2140 2380,2140
  lines w8: 5155,1965.41 5155,2540
  lines w10: 5155,1965.41 4888.78,1965.41 4888.78,2540 4950,2540 4950,2585 5095,2585 5095,2540 5155,2540
  text "Enable" at 2590,4240 h100
  text "2" at 3296,4013.72 h400
  text "Vbatt" at 4530,4002.5 h100
  text "5V" at 4542.5,3901.54 h100
  text "Rev C!" at 1165,3865 h200 r45
  text "5V_S" at 4525,3697.5 h100
  text "10V" at 4545,3606.54 h100
  text "+" at 1495,3590 h180
  text "3V3" at 4542.5,3514.04 h100
  text "Vbatt" at 4512.83,3258.25 h100
  text "VThrst" at 4457.5,3162.5 h100
  text "d" at 1552.5,3110 h400
  text "Thrust En" at 4457.5,3077.99 h60
  text "Ext En" at 4457.5,2979.57 h60
  text "En" at 4512.83,2867.5 h100
  text "I2C" at 4512.83,2769.08 h100
  text "A" at 1822.5,2722.5 h600
  text "OCP" at 3026.07,2713.08 h80
  text "KILL" at 3270,2713.08 h80
  text "GND" at 4512.83,2669.08 h100
  text "TartanAUV" at 1814.99,2642.5 h200
  text "SDA" at 4327.5,2503.72 h30 r90
  text "SCL" at 4327.5,2398.16 h30 r90
  text "Ext" at 724.28,2335.89 h100
  text "Tom Scherlis September 2019" at 2380,2118.67 h120
  text "%Bat" at 4448.15,2117.7 h30
  text "%Battery" at 5285,2100 h100 r90
  text "k" at 1915,1946.13 h200
  text "10V" at 5087.5,1853.5 h100
  text "+" at 1307.5,1803.79 h30
  text "5V-S" at 5087.5,1737.45 h100
  text "5V-L" at 5087.5,1608.5 h100
  text "3V3" at 5087.5,1483.5 h100
  text "Thrst" at 5087.5,1358.5 h100
Bottom Overlay:
  text "Revision B - September 2019" at 4792.5,3610 h250
  text "A" at 4775,2577.5 h1600
Mechanical 7:
  the board outline again, w10

## Text inside footprints (layer, text, board x,y; h text height)
U10: Top Overlay "*" at 3446.01,2523.77 h50; Mechanical 13 "*" at 3493.51,2485.5 h50